# Altium PCB jetsonStuff (3).PCBDOC
Units mil, origin at the board's own origin, x right, y up, seen from the top; angles counter-clockwise.
Board outline 2609.56 x 1008.54 mil, 4 copper layers (Top Layer, Top, Mid-Layer 1, Mid-Layer 2, Bottom Layer, Bottom); 26 components, 15 nets, 79 pads, 1 vias.
Unrouted connection lines stored in the file: 54.
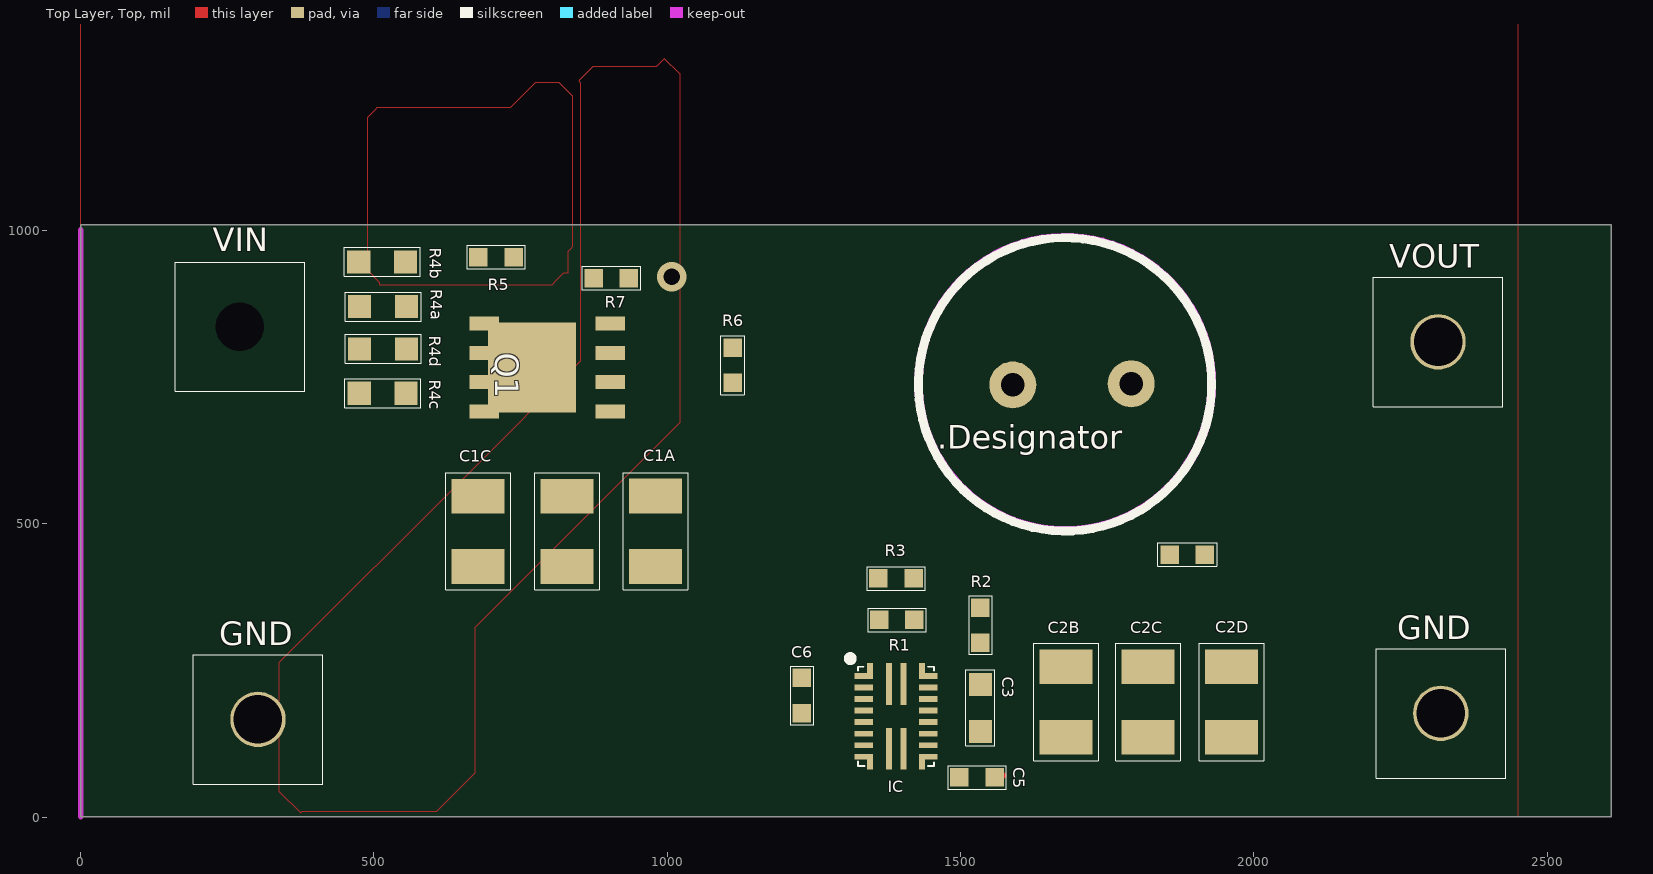
[diagram p0: Top Layer, Top view]
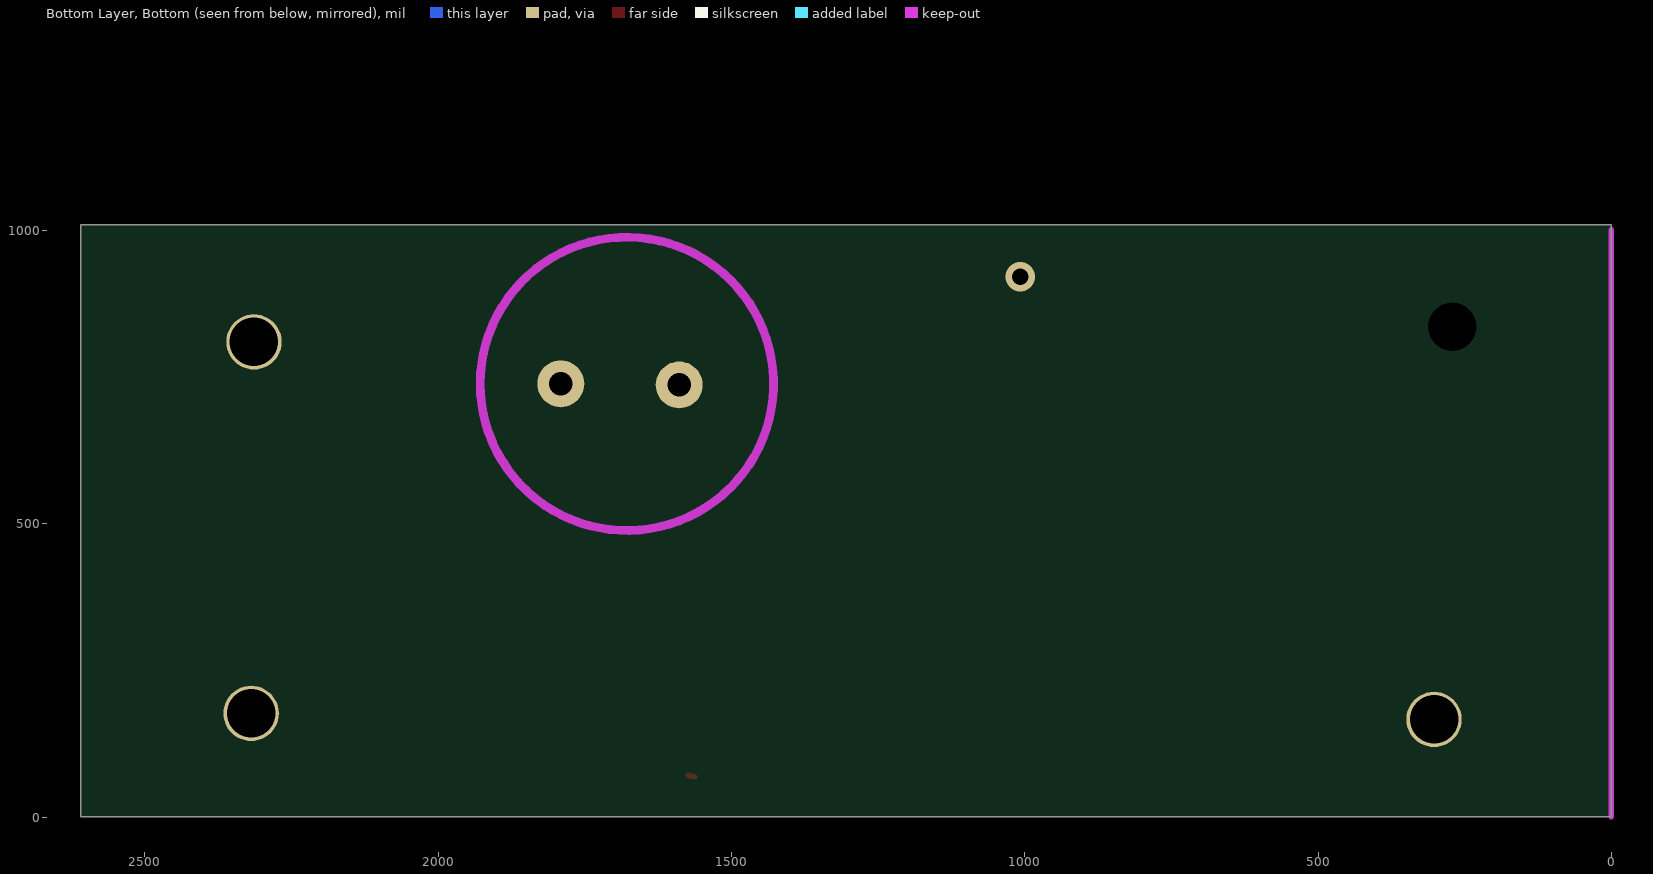
[diagram p1: Bottom Layer, Bottom view, seen from below]

## Layer stack, top to bottom
Top Solder, Top Mask: solder mask 0.4, Solder Resist, Dk 3.5
Top Layer, Top: signal copper 1.4
Dielectric1: core 12.6, FR-4, Dk 4.8
Mid-Layer 1: signal copper 1.4
Dielectric2: prepreg 12.6, FR-4, Dk 4.8
Mid-Layer 2: signal copper 1.4
Dielectric3: core 12.6, FR-4, Dk 4.8
Bottom Layer, Bottom: signal copper 1.4
Bottom Solder, Bot Mask: solder mask 0.4, Solder Resist, Dk 3.5

## Board outline
0,1 0,1009.54 2609.56,1009.54 2609.56,1

## Design rules (kind name [scope] priority, off if disabled: settings)
Clearance Clearance_GND1_PLANE [(InNet('GND1') AND IsRegion) vs (OnLayer('Bottom Layer, Bottom') OR OnLayer('Multi-Layer'))] p1: gap=25 ignorepadtopadclearanceinfootprint=FALSE except(0: Arc-Hole Track-Hole SMDPad-Hole THPad-Hole Via-Hole Fill-Hole Poly-Hole Region-Hole Text-Hole)
Clearance Clearance_U1 [InComponent('U1') vs InComponent('U1')] p2: gap=9 ignorepadtopadclearanceinfootprint=FALSE except(0: Arc-Hole Track-Hole SMDPad-Hole THPad-Hole Via-Hole Fill-Hole Poly-Hole Region-Hole Text-Hole)
Clearance [All] p3: gap=9 ignorepadtopadclearanceinfootprint=FALSE except(0: Arc-Hole Track-Hole SMDPad-Hole THPad-Hole Via-Hole Fill-Hole Poly-Hole Region-Hole Text-Hole)
FabricationTestpoint [(IsPad And (OnTopLayer Or OnBottomLayer))] p1: side=3 testpointundercomponent=TRUE minsize=40 maxsize=100 preferedsize=60 minholesize=0 maxholesize=40 preferedholesize=32 testpointgrid=1 allowsidetop=TRUE allowsidebottom=TRUE usegrid=TRUE gridtolerance=0.01
HoleSize [All] p1: absolutevalues=TRUE maxlimit=120 minlimit=9 maxpercent=80.000 minpercent=20.000
MinimumSolderMaskSliver [All] p1: minsoldermaskwidth=0
PlaneClearance [All] p1: clearance=9
PlaneConnect [All] p1: planeconnectstyle=Direct reliefexpansion=20 reliefentries=4 reliefconductorwidth=10 reliefairgap=10
PolygonConnect PolygonConnect_1 [All vs IsNamedPolygon('Top Layer, Top-No Net')] p1: thpad.connectstyle=Relief thpad.reliefconductorwidth=10 thpad.reliefentries=4 thpad.polygonreliefangle="90 Angle" thpad.airgapwidth=10 smdpad.connectstyle=Relief smdpad.reliefconductorwidth=20 smdpad.reliefentries=4 smdpad.polygonreliefangle="90 Angle" smdpad.airgapwidth=10 via.connectstyle=Relief via.reliefconductorwidth=10 via.reliefentries=4 via.polygonreliefangle="90 Angle" via.airgapwidth=10
PolygonConnect [All] p2: connectstyle=Direct reliefconductorwidth=10 reliefentries=4 polygonreliefangle="90 Angle" airgapwidth=10
RoutingVias [All] p1: holewidth=28 width=120 viastyle="Through Hole" minholewidth=9 minwidth=16 maxholewidth=100 maxwidth=50
SilkToSilkClearance [All] p1: silktosilkclearance=0
SilkToSolderMaskClearance SilkscreenOverComponentPads [IsPad] p1: minsilkscreentomaskgap=0 clearancetoexposedcopper=TRUE
SolderMaskExpansion [All] p1: expansion=4 istentingtop=FALSE
Width [All] p1: maxlimit=40 minlimit=7 preferedwidth=30
23 further rules are at their usual default settings.

## Classes and differential pairs
component class T-EV3435: C1A C1C C2B C2C C2D C5 C6 GND Q1 R2 R4a R4b R4c R4d R5 R6 R7 VIN VOUT

## Components (designator, comment, footprint, x,y, rotation, side; value= is the part's Value field where it differs from the comment)
C1A "CAP/1210" CAP/1210 980.01,547.32 r270 top
C1B "CAP/1210" CAP/1210 829.4,547.23 r270 top
C1C "CAP/1210" CAP/1210 677.08,547.23 r270 top
C2A "CAP/1210" CAP/1210 1961.81,256.05 r270 top
C2B "CAP/1210" CAP/1210 1679.62,256.06 r270 top
C2C "CAP/1210" CAP/1210 1819.69,256.05 r270 top
C2D "CAP/0603" CAP/0603 1856.58,447.59 r0 top
C3 "CAP/0805" CAP/0805 1533.82,145.92 r90 top
C5 "CAP/0603" CAP/0603 1558,67.81 r180 top
C6 "CAP/0603" CAP/0603 1229.65,177.35 r90 top
GND "GND" TP2MM#1 2318.93,176.85 r0 top (schematic designator VIN)
GND "GND" TP2MM#1 302.26,166.58 r0 top (schematic designator VIN)
IC "MP3435" QFN(3x4mm) 1334.81,240.68 r0 top (schematic designator U1)
Q1 "SiR802" Q1 903.09,691.44 r180 top
R1 "RES/0603" RES/0603 1421.48,336.34 r180 top
R2 "RES/0603" RES/0603 1533.82,297.26 r90 top
R3 "RES/0603" RES/0603 1420.03,407.01 r180 top (schematic designator R1)
R4a "RES/0805" CAP/0805 475.6,870.2 r0 top
R4b "RES/0805" CAP/0805 474.05,946.39 r0 top
R4c "RES/0805" CAP/0805 474.96,722.59 r0 top
R4d "RES/0805" CAP/0805 475.61,798.17 r0 top
R5 "RES/0603" RES/0603 738.19,954.79 r180 top
R6 "RES/0603" RES/0603 1111.46,800.33 r270 top
R7 "RES/0603" RES/0603 934.5,918.8 r180 top
VIN "VIN" TP2MM#2 271.43,835.83 r0 top
VOUT "VOUT" TP2MM#1 2314.12,810.18 r0 top (schematic designator VIN)

## Footprints (in the part's own frame and the unit in brackets; to place one, negate y for a bottom-side part, rotate by r counter-clockwise, add the part's x,y. Pads: shape width x height; smd on the part's side, far side on the other; paste and mask are expansions set on the pad)
CAP/0603 [mm]
  rect 0.8x0.8 smd: 1(0,0) 2(1.524,0)
  silkscreen extent -0.51,-0.51 2.03,0.51
CAP/0805 [mm]
  rect 1x1 smd: 1(0,0) 2(2.032,0)
  silkscreen extent -0.62,-0.62 2.67,0.64
CAP/1210 [mm]
  rect 1.5x2.3 smd paste-25.4: 1(0,0) 2(3.048,0)
  silkscreen extent -1.02,-1.4 4.06,1.4
Q1 [mil]
  rect 50x24 smd paste+0: 1(0,0) 2(0,-50) 3(0,-100) 4(0,-150) 5(215,-150) 6(215,-100) 7(215,-50) 8(215,0)
  rect 150x154 smd paste+0: 9(134,-75)
QFN(3x4mm) [mm]
  rect 0.8x0.25 smd: 1(0,0) 2(0,-0.5) 3(0,-1) 4(0,-1.5) 5(0,-2) 6(0,-2.5) 7(0,-3) 8(0.001,-3.5) 11(2.8,-3.5) 12(2.8,-3) 13(2.8,-2.5) 14(2.8,-2) 15(2.8,-1.5) 16(2.8,-1) 17(2.8,-0.5) 18(2.8,0)
  rect 0.25x0.675 smd: 1(0.275,0.213) 8(0.276,-3.713) 11(2.525,-3.713) 18(2.525,0.213)
  rect 0.25x1.8 smd: 9(1.1,-3.15) 10(1.725,-3.15) 19(1.725,-0.35) 20(1.1,-0.35)
  silkscreen extent -0.66,-3.9 3.05,0.83
RES/0603 [mm]
  rect 0.8x0.8 smd: 1(0,0) 2(1.524,0)
  silkscreen extent -0.51,-0.51 2.03,0.51
TP2MM#1 [mil]
  round 94.5 hole 82.68: 1(0,0)
  silkscreen extent -110,-110 110,110
TP2MM#2 [mil]
  round 74.8 hole 82.68: 1(0,0)
  silkscreen extent -110,-110 110,110

## Part data
C2D: library part CAP/1210
GND GND VIN VOUT: library part TP/2MM, "2mm  plugin pin"
Q1: library part Q1
R1 R2 R3 R4a R4b R4c R4d R5 R6 R7: "Film Res., 1%"

## Free pads (board coordinates)
  round 80 hole 40: 22(1589.23,736.77) 23(1791.03,738.65)

## Via types
v1: diameter 50, hole 28, Top Layer, Top to Bottom Layer, Bottom, 1 vias

## Nets (pads, with @x,y where several pads share a name; then routed paths per layer and width w, separated by ;. In a path a pad name is that pad's centre, name@x,y a point inside that pad or via, vN(x,y) a via of type N, cw(c..) or ccw(c..) an arc to the next point about the centre after c; other vN are vias at no path point)
GND: C1A.2 C1B.2 C1C.2 C2A.2 C2B.2 C2C.2 C2D.2 C3.2 GND.1 IC.10 IC.16 IC.17 IC.18 IC.19 R2.1 R6.1 R7.1
  other v1: 1007.82,921.22
NetC1A_1: C1A.1 C1B.1 C1C.1 IC.11 R4a.1 R4b.1 R4c.1 R4d.1 R5.2 VIN.1
NetC2A_1: C2A.1 C2B.1 C2C.1 C2D.1 IC.1 IC.2 IC.5 R1.2 R3.2 VOUT.1
NetC3_1: C3.1 IC.12
NetC4_1: IC.15
NetC5_1: C5.1 | length 10.6
  Top Layer, Top w10: C5.1@1562.76,68.68 C5.1@1573.23,70.61
NetC5_2: C5.2 IC.13
NetC6_1: C6.1 IC.4
NetC6_2: C6.2 IC.9 IC.20
NetEN_1: IC.6 R5.1 R6.2
NetL1_1: Q1.1 Q1.2 Q1.3
NetQ1_4: IC.7 Q1.4 R7.2
NetQ1_5: IC.8 Q1.5 Q1.6 Q1.7 Q1.8 Q1.9 R4a.2 R4b.2 R4c.2 R4d.2
NetR1_1: IC.14 R1.1 R2.2 R3.1
NetR5_2: 
pads on no net: IC.3

## Polygon pours and split planes (outlines as drawn)
NetC1A_1 on Top Layer, Top "Top Layer, Top-No Net" (solid, remove dead copper, shelved, pour order 41): 608,11 673,76 673,104 673,324 676,327 1022,673 1022,1267 1021,1267 995,1293 981,1279 876,1279 873,1279 849,1255 852,1252 852,797 852,777 665,590 338,263 338,44 375,7 378,10 607,10
GND on Top Layer, Top "Top Layer, Top-No Net1" (solid, remove dead copper, shelved, pour order 48): 0,1 0,2451 2450,2451 2450,1
NetQ1_5 on Top Layer, Top "Top Layer, Top-No Net" (solid, remove dead copper, shelved, pour order 55): 837,971 830,964 830,927 823,927 810,914 803,907 510,907 510,911 489,932 489,1192 489,1193 503,1207 506,1210 727,1210 733,1210 760,1237 776,1253 815,1253 833,1235 838,1230 838,972

## Keep-outs
Keep-Out Layer, Board:
  circle w15: c1678.34,738.64 r250
  lines w10: 0,1 0,1001

## Silkscreen, mask and mechanical layers (free items; w line width, h text height)
Top Overlay, Top Silk:
  circle w15: c1678.15,737.66 r250
  text ".Designator" at 1460.4,627.58 h40
Mechanical 1, Top Assy:
  text ".Designator" at 1478.4,811.97 h40
ZEBRABoardOutline:
  lines w10: 0,0 0,1000 ; 0,2501 0,3221
Mechanical 4, Title:
  lines w10: -1450,-1199 -1250,-1199 ; -1450,551 -1250,551 ; -1450,2301 -1250,2301 ; 950,-2999 950,-2799 ; 950,3901 950,4101 ; 3350,-2999 3350,-2799 ; 3350,3901 3350,4101 ; 4950,-2799 4950,-1799 7950,-1799 ; 4950,-2649 7950,-2649 ; 4950,-2499 7950,-2499 ; 4950,-2099 7950,-2099 ; 5450,-2499 5450,-2099 ; 5750,-2999 5750,-2799 ; 5750,3901 5750,4101 ; 6750,-2799 6750,-2499 ; 7450,-2499 7450,-2099 ; 7950,-1199 8150,-1199 ; 7950,2301 8150,2301 ; -1450,-2999 8150,-2999 8150,4101 -1450,4101 -1450,-2999 ; -1250,-2799 7950,-2799 7950,3901 -1250,3901 -1250,-2799
  text "A" at -316.88,3883.5 h112.5
  text "B" at 2099.69,3883.5 h112.5
  text "C" at 4474.69,3883.5 h112.5
  text "D" at 6874.69,3883.5 h112.5
  text "1" at -1422.5,3083.5 h112.5
  text "1" at 7977.5,3083.5 h112.5
  text "2" at -1422.5,1308.5 h112.5
  text "2" at 7977.5,1308.5 h112.5
  text "3" at -1422.5,-441.5 h112.5
  text "Title" at 5000,-1966.5 h62.5
  text "MP3435 Demo Board" at 5520,-1994 h50
  text "4" at -1422.5,-2216.5 h112.5
  text "4" at 7977.5,-2216.5 h112.5
  text "Size" at 5000,-2266.5 h62.5
  text "Number" at 5500,-2266.5 h62.5
  text "Rev" at 7500,-2266.5 h62.5
  text "T-EV3435-L-00A.pcb" at 6150,-2349 h50
  text "00A" at 7635,-2399 h50
  text "A" at 5143.61,-2446.75 h125
  text "Luna Lan" at 7341,-2623 h50
  text "9/18/2019" at 5700,-2629 h50
  text "Date" at 5000,-2641.5 h62.5
  text "Drawn by" at 6800,-2641.5 h62.5
  text "1" at 7227.15,-2782.11 h50
  text "1" at 7712.38,-2785.42 h50
  text "Filename" at 5000,-2791.5 h62.5
  text "Sheet" at 6800,-2791.5 h62.5
  text "of" at 7450,-2791.5 h62.5
  text "A" at -316.88,-3016.5 h112.5
  text "B" at 2074.69,-3016.5 h112.5
  text "C" at 4474.69,-3016.5 h112.5
  text "D" at 6874.69,-3016.5 h112.5